# EAGLE board layout2 (EAGLE 9.1.3)
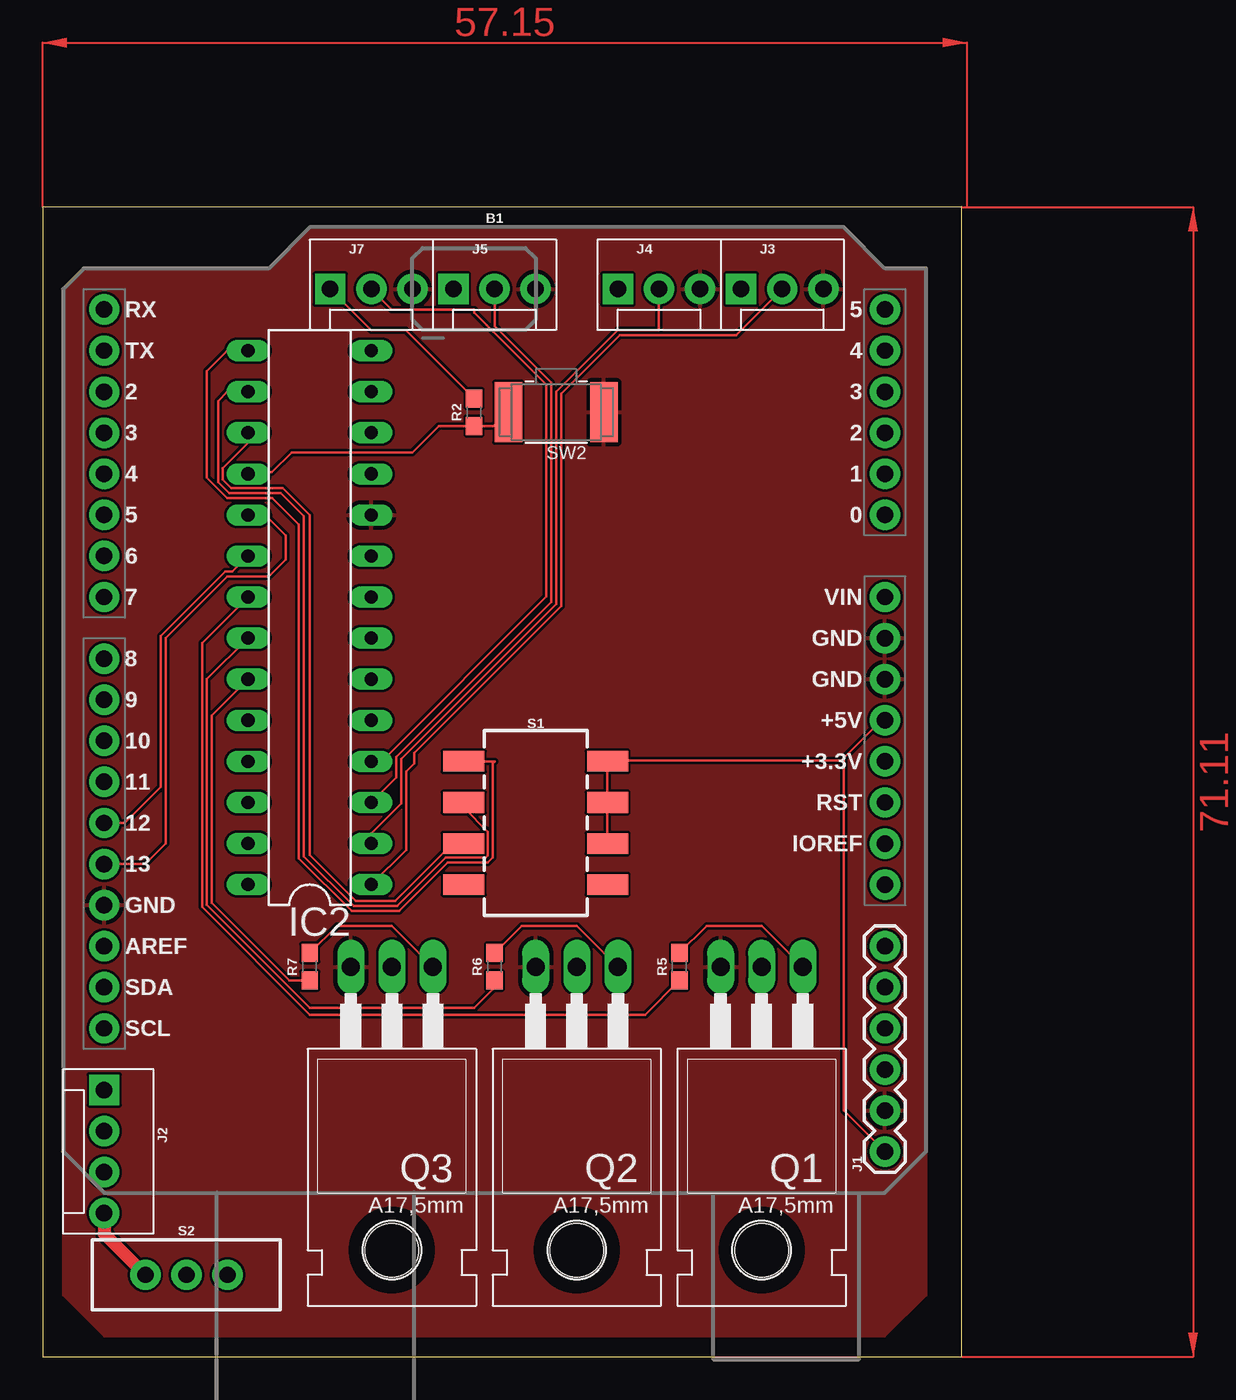
[diagram p0: board, top side]
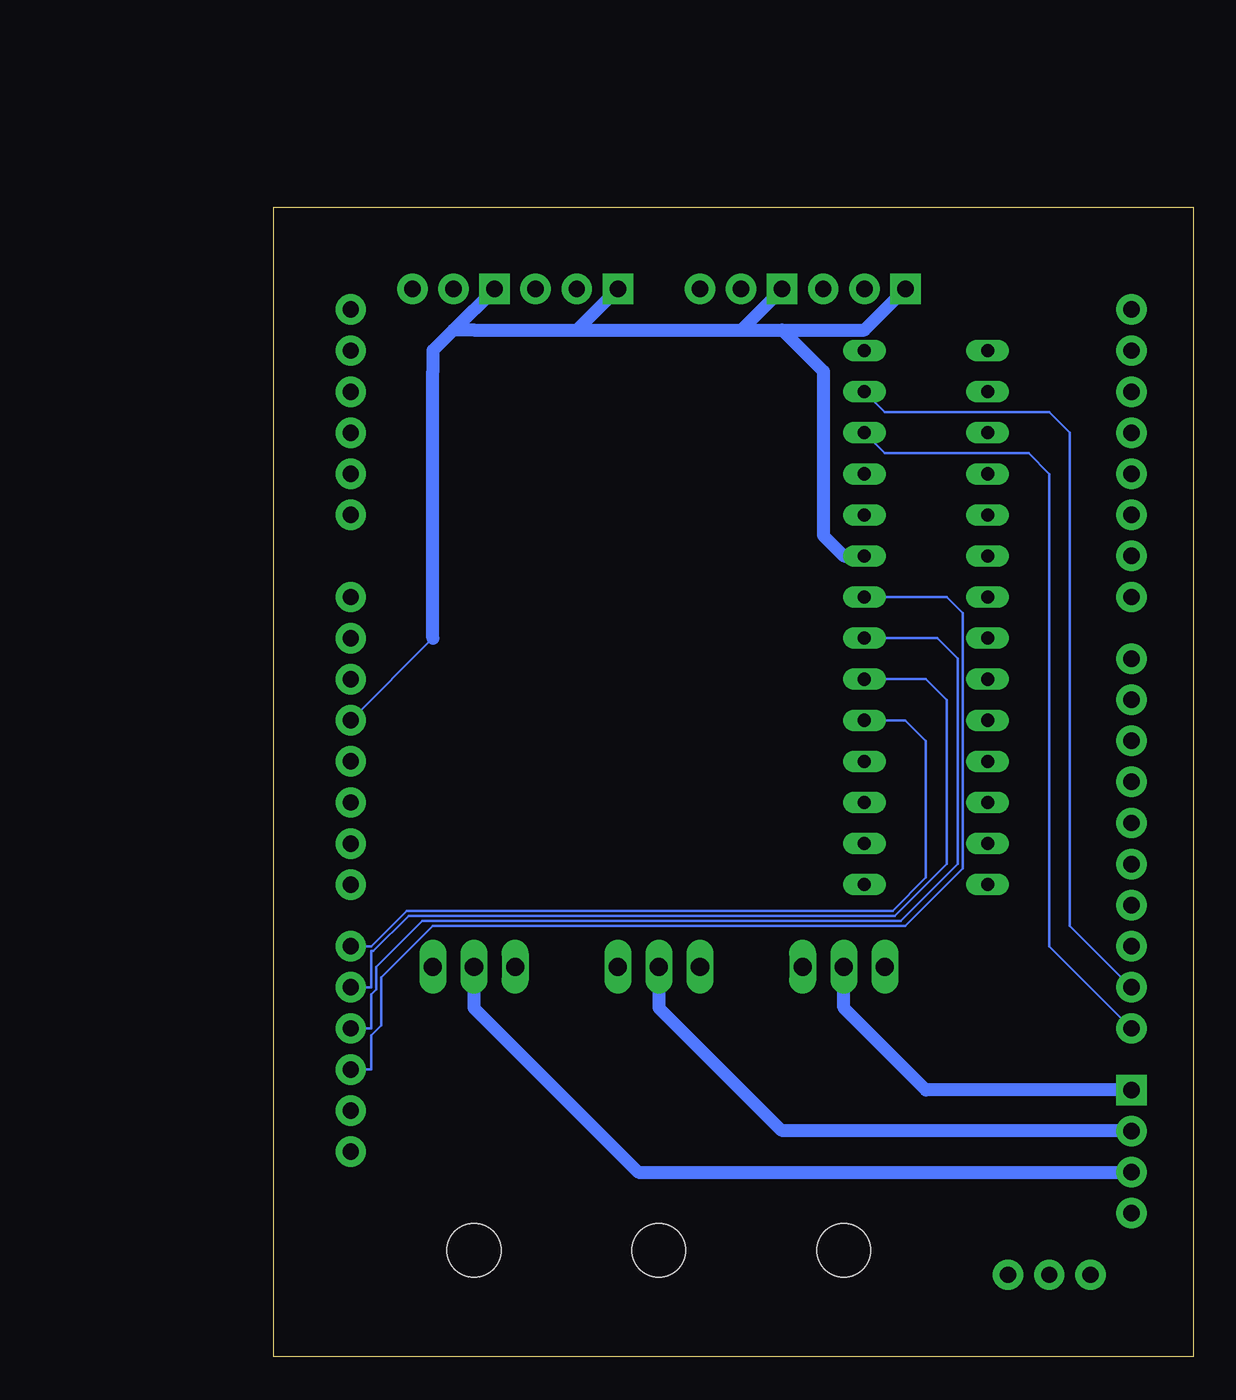
[diagram p1: board, bottom side, seen from below]

Size 56.82 x 71.11 mm. Coordinates in mm from the lower left corner, seen from the top.
Outline: 0,0 56.82,0 56.82,71.11 0,71.11 0,0
Copper layers (1*16): Top 0.035mm / dielectric 1.5mm / Bottom 0.035mm
Design rules "default": minimum track width 6mil, minimum drill 0.35mm, track to track 6mil, track to pad 6mil, pad to pad 6mil, via to via 6mil, smd to smd 6mil, copper to edge 40mil, drill to drill 6mil, minimum pad ring 10mil, minimum via ring 8mil, stop-mask expansion 4mil, vias tented up to drill 0mil, thermal gap 10mil

## Footprints (pad centres in the part's own frame; a part is rotated, then mirrored left to right if it is on the bottom)
UNO_R3_SHIELD = drill 1.016 pad 1.88: 3.3V 24.13,-2.54; 5V 24.13,0; A0 24.13,12.7; A1 24.13,15.24; A2 24.13,17.78; A3 24.13,20.32; A4 24.13,22.86; A5 24.13,25.4; AREF -24.13,-13.97; D2 -24.13,20.32; D3 -24.13,17.78; D4 -24.13,15.24; D5 -24.13,12.7; D6 -24.13,10.16; D7 -24.13,7.62; D8 -24.13,3.81; D9 -24.13,1.27; D10 -24.13,-1.27; D11 -24.13,-3.81; D12 -24.13,-6.35; D13 -24.13,-8.89; GND@0 24.13,2.54; GND@1 24.13,5.08; GND@2 -24.13,-11.43; IOREF 24.13,-7.62; NC 24.13,-10.16; RES 24.13,-5.08; RX -24.13,25.4; SCL -24.13,-19.05; SDA -24.13,-16.51; TX -24.13,22.86; VIN 24.13,7.62
DIL28-3 = drill 0.813 long: 1 -16.51,-3.81; 2 -13.97,-3.81; 3 -11.43,-3.81; 4 -8.89,-3.81; 5 -6.35,-3.81; 6 -3.81,-3.81; 7 -1.27,-3.81; 8 1.27,-3.81; 9 3.81,-3.81; 10 6.35,-3.81; 11 8.89,-3.81; 12 11.43,-3.81; 13 13.97,-3.81; 14 16.51,-3.81; 15 16.51,3.81; 16 13.97,3.81; 17 11.43,3.81; 18 8.89,3.81; 19 6.35,3.81; 20 3.81,3.81; 21 1.27,3.81; 22 -1.27,3.81; 23 -3.81,3.81; 24 -6.35,3.81; 25 -8.89,3.81; 26 -11.43,3.81; 27 -13.97,3.81; 28 -16.51,3.81
1X06 = drill 1.016 pad 1.88: 1 0,0; 2 2.54,0; 3 5.08,0; 4 7.62,0; 5 10.16,0; 6 12.7,0
MOLEX-1X4 = drill 1.016 pad 1.88 square: 1 0,0 | drill 1.016 pad 1.88: 2 2.54,0; 3 5.08,0; 4 7.62,0
MOLEX-1X3 = drill 1.016 pad 1.88 square: 1 0,0 | drill 1.016 pad 1.88: 2 2.54,0; 3 5.08,0
TO220 = drill 1.118 long: 1 -2.54,-6.35; 2 0,-6.35; 3 2.54,-6.35 | hole 3.302: 0,11.176
0603 = smd 1.1 x 1: 1 -0.85,0; 2 0.85,0
DIPSWITCH-04-SMD = smd 1.27 x 2.54: 1 -3.81,4.445; 2 -1.27,4.445; 3 1.27,4.445; 4 3.81,4.445; 5 3.81,-4.445; 6 1.27,-4.445; 7 -1.27,-4.445; 8 -3.81,-4.445
SWITCH_SPDT_PTH_11.6X4.0MM = drill 1.016 pad 1.88: 1 0,2.54; 2 0,0; 3 0,-2.54
BTN_CK_KSS = smd 1.7 x 3.7: P$1 -2.95,0; P$2 2.95,0

## Placement (x,y rotation side)
B1  ARDUINO_UNO_R3_SHIELDBASIC  [UNO_R3_SHIELD]  27.94,39.37 0 top
IC2  MCP23017SP  [DIL28-3]  16.51,45.72 90 top
J1  IR Sensor  [1X06]  52.07,12.7 90 top
J2  LED  [MOLEX-1X4]  3.81,16.51 270 top
J3  Radius A  [MOLEX-1X3]  43.18,66.04 0 top
J4  Radius B  [MOLEX-1X3]  35.56,66.04 0 top
J5  Theta A  [MOLEX-1X3]  25.4,66.04 0 top
J7  Theta B  [MOLEX-1X3]  17.78,66.04 0 top
Q1  200mA/40V  [TO220]  44.45,17.78 180 top
Q2  200mA/40V  [TO220]  33.02,17.78 180 top
Q3  200mA/40V  [TO220]  21.59,17.78 180 top
R2  10k  [0603]  26.67,58.42 90 top
R5  100  [0603]  39.37,24.13 90 top
R6  100  [0603]  27.94,24.13 90 top
R7  100  [0603]  16.51,24.13 90 top
S1  DIP-04SMD  [DIPSWITCH-04-SMD]  30.48,33.02 270 top
S2  LED  [SWITCH_SPDT_PTH_11.6X4.0MM]  8.89,5.08 270 top
SW2  Reset  [BTN_CK_KSS]  31.75,58.42 180 top

## Library data of the parts
B1 = SparkFun-Boards
IC2 SW2 = adafruit
J1 = SparkFun-Connectors; PROD_ID: CONN-08437
J2 = SparkFun-Connectors; PROD_ID: CONN-08186; SF_ID: PRT-08231
J3-J5 J7 = SparkFun-Connectors; PROD_ID: CONN-08625; SF_ID: PRT-08096
Q1-Q3 = transistor-neu-to92
R2 = SparkFun-Resistors; PROD_ID: RES-00824
R5-R7 = SparkFun-Resistors; PROD_ID: RES-12438
S1 = SparkFun-Switches; PROD_ID: SWCH-12418
S2 = SparkFun-Switches; PROD_ID: SWCH-08261; SF_SKU: COM-00102

## Nets
12V: S2.2
A0: IC2.15 S1.8
A1: IC2.16 S1.7
A2: IC2.17 S1.6
BLUE: IC2.23 R7.1
GND: B1.GND@0 B1.GND@1 B1.GND@2 IC2.10 J1.2 J3.3 J4.3 J5.3 J7.3 Q1.3 Q2.3 Q3.3 SW2.P$1
GREEN: IC2.21 R5.1
INT_A: B1.D12 IC2.20
INT_B: B1.D13 IC2.19
IR_A: IC2.8 J1.3
IR_B: IC2.7 J1.4
IR_C: IC2.6 J1.5
IR_D: IC2.5 J1.6
N$1: J2.4 S2.3
N$2: Q1.1 R5.2
N$3: J2.3 Q1.2
N$4: Q2.1 R6.2
N$5: J2.2 Q2.2
N$6: Q3.1 R7.2
N$7: J2.1 Q3.2
RADIUS_A: IC2.1 J3.2
RADIUS_B: IC2.2 J4.2
RED: IC2.22 R6.1
RESET: IC2.18 R2.1 SW2.P$2
SDA: B1.SDA IC2.13
SDL: B1.SCL IC2.12
THETA_A: IC2.3 J5.2
THETA_B: IC2.4 J7.2
VCC: B1.5V IC2.9 J1.1 J3.1 J4.1 J5.1 J7.1 R2.2 S1.1 S1.2 S1.3

## Tracks (layer width: path | path; a pad name or v marks a point on that pad's centre or on a via)
A0
  Top 0.152: S1.8 27.94,36.83 27.84,36.73 27.84,30.89 27.53,30.58 25.04,30.58 22.05,27.58 19.1,27.58 15.85,30.84 15.85,51.46 14.2,53.11 11.42,53.11 10.16,54.37 10.16,60.96 11.43,62.23 IC2.15
A1
  Top 0.152: 10.85,57.21 10.85,54.61 | 10.85,54.61 10.85,54.12 11.54,53.42 14.73,53.42 16.15,51.99 16.15,30.96 19.23,27.89 21.92,27.89 24.92,30.89 27.4,30.89 27.53,31.02 27.53,32.48 26.04,33.98 S1.7 | 11.43,59.69 IC2.16 11.43,59.69 | 10.85,54.61 10.85,59.11 11.43,59.69
A2
  Top 0.152: S1.6 25.98,31.7 25.3,31.7 21.79,28.19 19.36,28.19 16.51,31.04 16.51,52.07 14.86,53.72 11.67,53.72 11.15,54.24 11.15,54.98 12.7,56.53 IC2.17
BLUE
  Top 0.152: IC2.23 10.46,39.67 10.46,28.07 15.25,23.28 R7.1
GND
  pour Top (rank 2): 1.27,66.04 2.54,67.31 13.97,67.31 16.51,69.85 49.53,69.85 52.07,67.31 54.61,67.31 54.61,3.81 52.07,1.27 3.81,1.27 1.27,3.81
GREEN
  Top 0.152: IC2.21 9.86,44.15 9.86,27.81 16.5,21.16 37.26,21.16 R5.1
INT_A
  Top 0.152: IC2.20 11.73,48.56 11.3,48.56 7.32,44.58 7.32,35.26 5.08,33.02 B1.D12
INT_B
  Top 0.152: B1.D13 6.35,30.48 7.62,31.75 7.62,44.45 11.43,48.26 13.97,48.26 15.02,49.31 15.02,50.8 13.97,51.85 13.97,52.07 IC2.19
IR_A
  Bottom 0.152: J1.3 50.8,17.78 50.8,19.89 50.19,20.5 50.19,23.47 46.99,26.67 17.78,26.67 14.25,30.2 14.25,46 15.24,46.99 IC2.8
IR_B
  Bottom 0.152: 20.42,44.35 IC2.7 15.82,44.45 14.55,43.18 14.55,30.48 18.06,26.98 47.65,26.98 50.49,24.13 50.49,22.73 50.8,22.43 50.8,20.32 J1.4 52.12,20.42
IR_C
  Bottom 0.152: IC2.6 16.51,41.91 15.24,40.64 15.24,30.48 18.44,27.28 48.49,27.28 50.67,25.09 50.8,25.09 50.8,22.86 J1.5
IR_D
  Bottom 0.152: 51.97,25.45 J1.6 50.8,25.4 48.62,27.58 18.57,27.58 16.51,29.64 16.51,38.1 17.78,39.37 IC2.5
N$1
  Top 0.152: 6.25,5.18 S2.3 | 3.81,8.84 J2.4
  Top 0.813: J2.4 3.81,7.62 S2.3
N$2
  Top 0.152: 46.94,23.62 46.94,24.08 Q1.1 44.45,26.67 41.06,26.67 R5.2
N$3
  Bottom 0.813: Q1.2 44.45,21.59 34.29,11.43 J2.3
N$4
  Top 0.152: Q2.1 33.02,26.67 29.63,26.67 R6.2
N$5
  Bottom 0.152: 3.81,14.02 J2.2
  Bottom 0.813: Q2.2 33.02,21.59 25.45,14.02 3.81,14.02
N$6
  Top 0.152: R7.2 18.2,26.67 21.59,26.67 Q3.1
N$7
  Bottom 0.813: Q3.2 21.59,21.59 16.51,16.51 J2.1
RADIUS_A
  Top 0.152: IC2.1 22.47,31.36 22.47,35.49 22.47,35.56 22.47,36.2 22.98,36.71 22.98,37.36 32.06,46.44 32.06,59.57 35.69,63.2 42.88,63.2 J3.2
RADIUS_B
  Top 0.152: IC2.2 20.32,32.37 22.16,34.22 22.16,36.33 22.17,36.34 22.17,36.98 31.76,46.57 31.76,59.7 35.56,63.5 38.1,63.5 J4.2
RED
  Top 0.152: R6.1 27.94,22.86 26.67,21.59 16.51,21.59 10.16,27.94 10.16,41.91 IC2.22
RESET
  Top 0.152: SW2.P$2 28.65,58.37 27.85,57.57 R2.1 24.5,57.57 22.86,55.93 15.39,55.93 14.17,54.71 12.8,54.71 IC2.18
SDA
  Bottom 0.152: B1.SDA 7.62,26.67 7.62,57.15 8.89,58.42 19.05,58.42 IC2.13
SDL
  Bottom 0.152: IC2.12 19.05,55.88 10.16,55.88 8.89,54.61 8.89,25.4 B1.SCL
THETA_A
  Top 0.152: J5.2 27.94,63.75 31.45,60.24 31.45,46.69 21.87,37.11 21.87,36.83 | 21.87,36.46 21.87,36.83 | 21.87,36.83 21.87,36.46 | 21.87,36.46 21.86,36.45 21.86,35.83 IC2.3
THETA_B
  Top 0.152: IC2.4 20.97,36.83 31.15,47.01 31.15,60.11 27.85,63.41 | 27.46,63.8 27.85,63.41 | J7.2 21.59,64.77 26.67,64.77 26.67,64.59 27.85,63.41
VCC
  Top 0.152: 25.45,65.38 25.45,65.99 J5.1 | 34.9,34.29 34.9,31.85 S1.3 | 34.9,34.29 S1.2 34.9,34.29 | 34.9,34.29 34.9,36.73 S1.1 35.05,36.88 49.38,36.88 51.97,39.47 | 51.97,39.47 B1.5V | J7.1 20.32,63.5 22.44,63.5 R2.2 | J1.1 49.53,15.24 49.53,37.03 51.97,39.47
  Bottom 0.152: 43.13,65.99 J3.1 | 17.83,66.14 J7.1 | 25.3,66.14 J5.1 25.3,65.94 | 35.51,65.99 J4.1 | 51.97,39.47 B1.5V 46.99,44.45
  Bottom 0.813: 46.99,44.45 46.99,60.96 46.99,62.23 45.72,63.5 | 38.1,63.5 44.45,63.5 45.72,63.5 | 38.1,63.5 27.94,63.5 | 27.94,63.5 25.4,63.5 | 25.4,63.5 20.32,63.5 J7.1 | J5.1 27.94,63.5 | J4.1 38.1,63.5 | J3.1 45.72,63.5 | 25.4,63.5 22.86,60.96 22.86,50.8 21.59,49.53 IC2.9
(copper drawn outside any net)
  shapes: Top area x2